# EAGLE board 12VAttinyDischargeChecker-SingleModule (EAGLE 8.5.2)
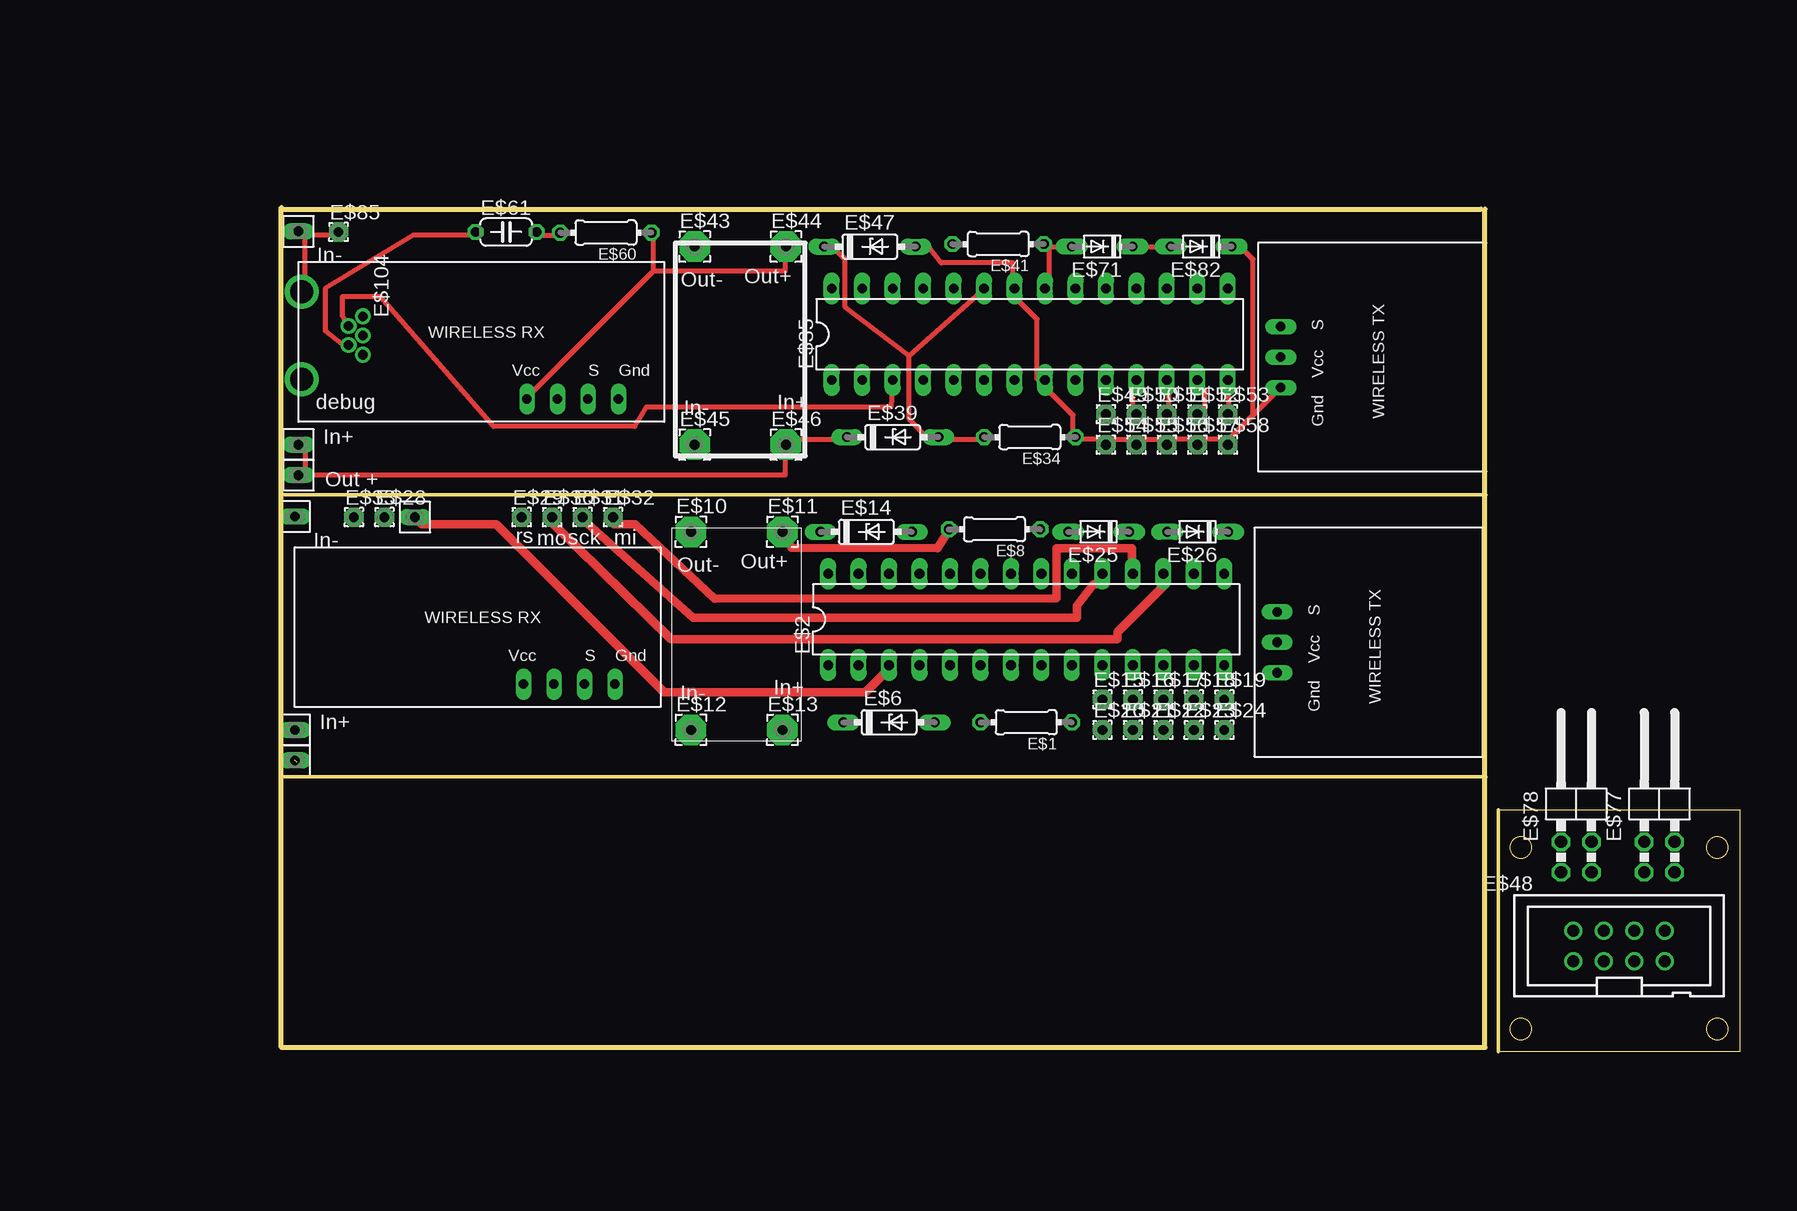
[diagram p0: board, top side]
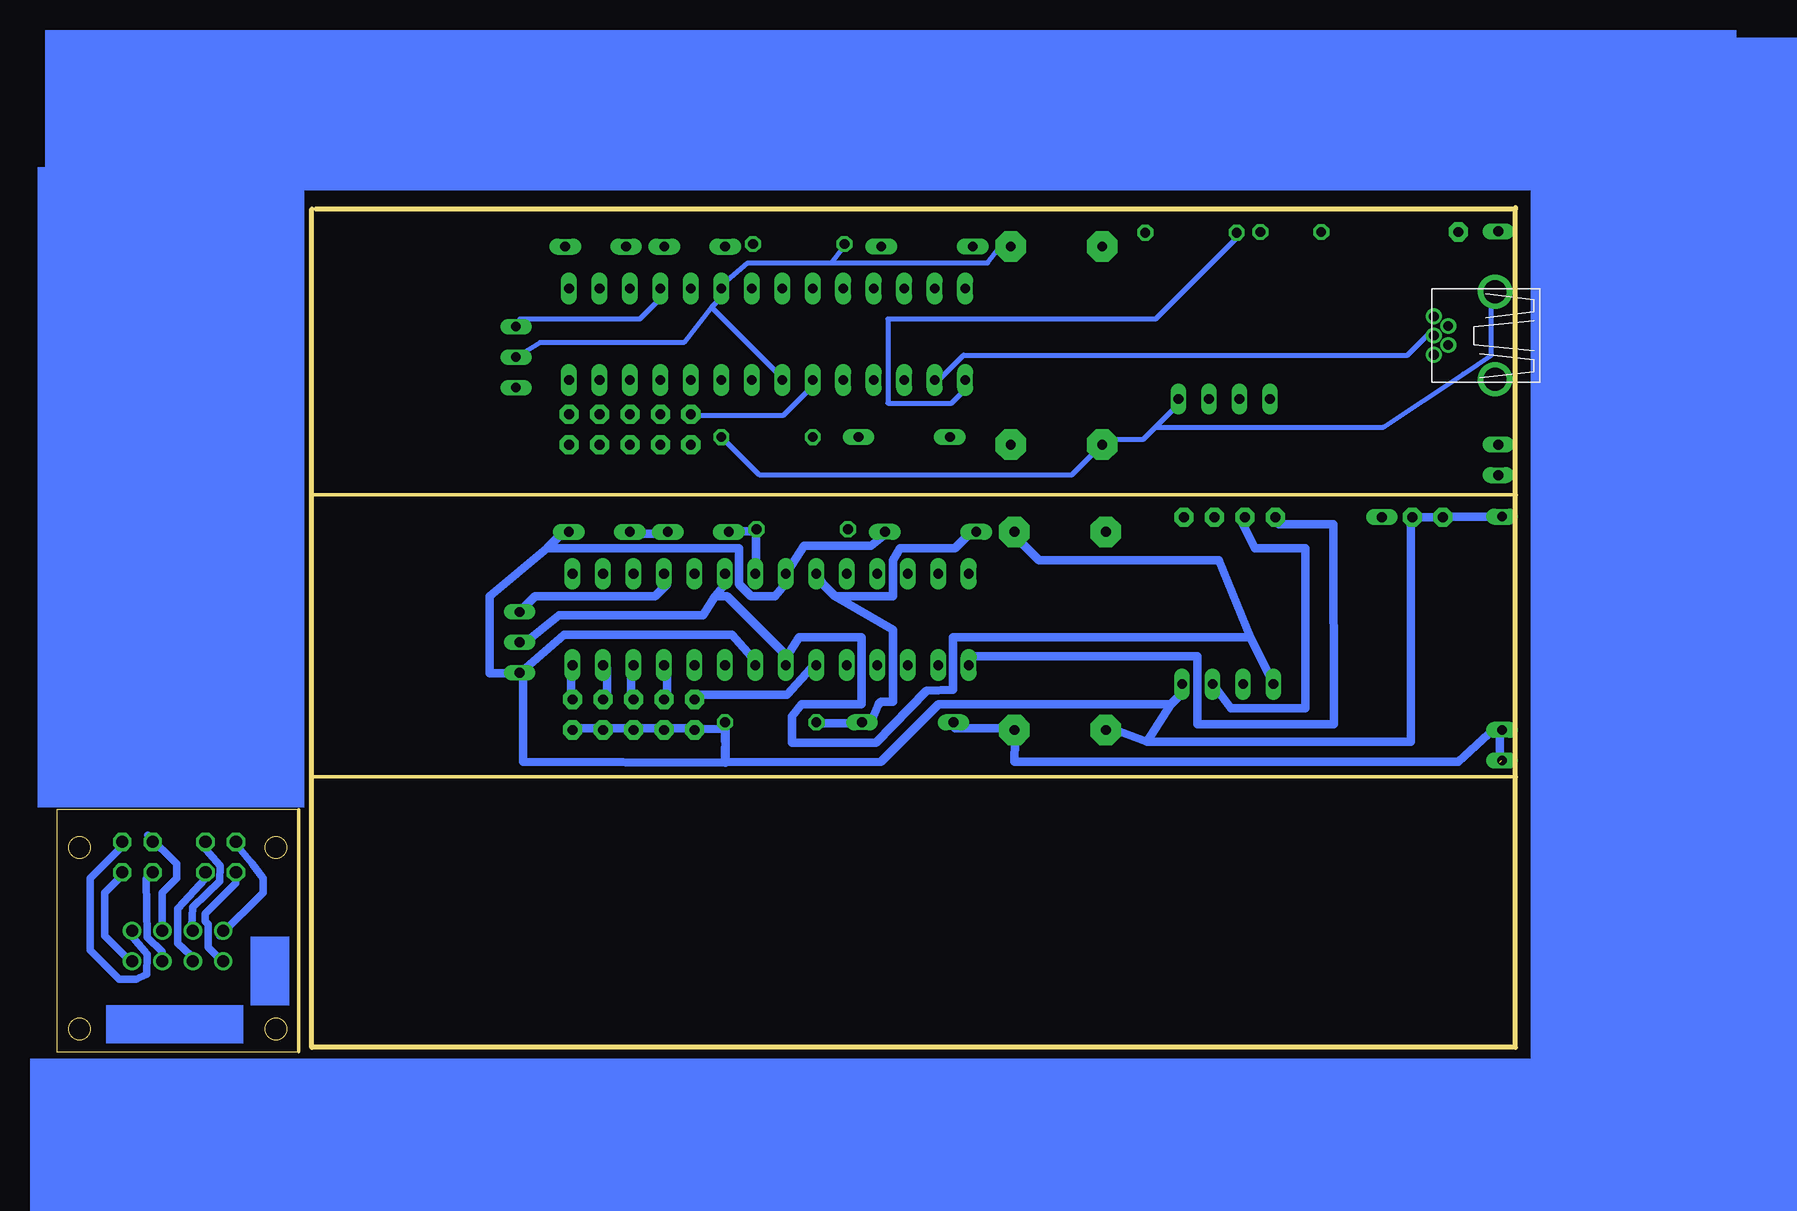
[diagram p1: board, bottom side, seen from below]

Size 121.58 x 70.37 mm. Coordinates in mm from the lower left corner, seen from the top.
Outline: 0,46.4 0,69.9 0,70.05
Outline: 100.33,46.4 100.33,69.9
Outline: 0,46.4 100.33,46.4
Outline: 0,22.91 0,0.37 100.33,0.37 100.33,22.91
Outline: 0,22.91 0,46.4
Outline: 0,46.4 0,70.22
Outline: 0,70.22 0,70.37
Outline: 0,70.22 100,70.22
Outline: 100.33,22.91 100.33,46.4
Outline: 100.33,46.4 100.33,70.22
Outline: 0,22.91 100.33,22.91
Outline: 101.42,0 101.42,20.17 121.58,20.17 121.58,0 101.42,0
Outline: circle at 119.69,17.01 radius 0.89
Outline: circle at 103.31,17.01 radius 0.89
Outline: circle at 103.31,1.89 radius 0.89
Outline: circle at 119.69,1.89 radius 0.89
Copper layers (1*16): Top 0.035mm / dielectric 1.5mm / Bottom 0.035mm
Design rules "default": minimum track width 10mil, minimum drill 24mil, track to track 8mil, track to pad 8mil, pad to pad 8mil, via to via 8mil, smd to smd 8mil, copper to edge 40mil, drill to drill 8mil, minimum pad ring 10mil, minimum via ring 8mil, stop-mask expansion 4mil, vias tented up to drill 0mil, thermal gap 10mil

## Footprints (pad centres in the part's own frame; a part is rotated, then mirrored left to right if it is on the bottom)
0204/7 = drill 0.813 octagon: 1 -3.81,0; 2 3.81,0
DIL28-3 = drill 0.813 long: 1 -16.51,-3.81; 2 -13.97,-3.81; 3 -11.43,-3.81; 4 -8.89,-3.81; 5 -6.35,-3.81; 6 -3.81,-3.81; 7 -1.27,-3.81; 8 1.27,-3.81; 9 3.81,-3.81; 10 6.35,-3.81; 11 8.89,-3.81; 12 11.43,-3.81; 13 13.97,-3.81; 14 16.51,-3.81; 15 16.51,3.81; 16 13.97,3.81; 17 11.43,3.81; 18 8.89,3.81; 19 6.35,3.81; 20 3.81,3.81; 21 1.27,3.81; 22 -1.27,3.81; 23 -3.81,3.81; 24 -6.35,3.81; 25 -8.89,3.81; 26 -11.43,3.81; 27 -13.97,3.81; 28 -16.51,3.81
WIRELESS-TX-FLAT = drill 0.8 long: P$1 0.635,-6.35; P$2 -1.905,-6.35; P$3 3.175,-6.35
FE01-1 = drill 0.813 long: 1 -1.27,0
DO35Z7 = drill 0.813 long: A 3.81,0; C -3.81,0
WIRELESS-RX-FLAT = drill 0.8 long: P$1 3.81,-6.985; P$2 6.35,-6.985; P$3 8.89,-6.985; P$4 11.43,-6.985
2,54/0,8 = drill 0.813 pad 2.54 octagon: 1 0,0
1,6/0,8 = drill 0.813 pad 1.6 octagon: 1 0,0
DO34-5 = drill 0.813 long: A 2.54,0; C -2.54,0
PAK100/2500-8 = drill 1 pad 1.422: 3 -2.54,-1.27; 4 -2.54,1.27; 5 0,-1.27; 6 0,1.27; 7 2.54,-1.27; 8 2.54,1.27; 9 5.08,-1.27; 10 5.08,1.27
C050-024X044 = drill 0.813 octagon: 1 -2.54,0; 2 2.54,0
2X02/90 = drill 1.016 octagon: 1 -1.27,-6.35; 2 -1.27,-3.81; 3 1.27,-6.35; 4 1.27,-3.81
USB-MB-H = drill 0.8: D+ 5.1,0; D- 3.9,0.8; GND 5.1,-1.6; ID 3.9,-0.8; VBUS 5.1,1.6 | drill 1.9: P$6 0,-3.65; P$7 0,3.65

## Placement (x,y rotation side)
E$1  220  [0204/7]  62.09,27.45 180 top
E$2  [DIL28-3]  62.09,36.02 0 top
E$3  [WIRELESS-TX-FLAT]  89.36,34.75 270 top
E$4  [FE01-1]  1.13,25.54 90 top
E$5  [FE01-1]  1.13,25.54 270 top
E$6  Zener 12v  [DO35Z7]  50.66,27.45 0 top
E$7  [WIRELESS-RX-FLAT]  16.37,37.61 0 top
E$8  220  [0204/7]  59.45,43.53 180 top
E$9  [FE01-1]  1.13,45.86 90 top
E$10  [2,54/0,8]  34.15,43.32 0 top
E$11  [2,54/0,8]  41.77,43.32 0 top
E$12  [2,54/0,8]  34.15,26.81 0 top
E$13  [2,54/0,8]  41.77,26.81 0 top
E$14  Zener 5v  [DO35Z7]  48.75,43.32 0 top
E$15  [1,6/0,8]  68.44,29.35 0 top
E$16  [1,6/0,8]  70.98,29.35 0 top
E$17  [1,6/0,8]  73.52,29.35 0 top
E$18  [1,6/0,8]  76.06,29.35 0 top
E$19  [1,6/0,8]  78.6,29.35 0 top
E$20  [1,6/0,8]  68.44,26.81 0 top
E$21  [1,6/0,8]  70.98,26.81 0 top
E$22  [1,6/0,8]  73.52,26.81 0 top
E$23  [1,6/0,8]  76.06,26.81 0 top
E$24  [1,6/0,8]  78.6,26.81 0 top
E$25  [DO34-5]  68.12,43.32 180 top
E$26  [DO34-5]  76.37,43.32 180 top
E$27  [FE01-1]  11.13,43.28 270 top
E$28  [1,6/0,8]  8.59,44.55 0 top
E$29  [1,6/0,8]  20.02,44.55 0 top
E$30  [1,6/0,8]  22.56,44.55 0 top
E$31  [1,6/0,8]  25.1,44.55 0 top
E$32  [1,6/0,8]  27.64,44.55 0 top
E$33  [1,6/0,8]  6.05,44.55 0 top
E$34  220  [0204/7]  62.38,51.22 180 top
E$35  [DIL28-3]  62.38,59.79 0 top
E$36  [WIRELESS-TX-FLAT]  89.66,58.52 270 top
E$37  [FE01-1]  1.42,49.31 90 top
E$38  [FE01-1]  1.42,49.31 270 top
E$39  Zener 12v  [DO35Z7]  50.95,51.22 0 top
E$40  [WIRELESS-RX-FLAT]  16.66,61.38 0 top
E$41  220  [0204/7]  59.75,67.3 180 top
E$42  [FE01-1]  1.42,69.63 90 top
E$43  [2,54/0,8]  34.44,67.09 0 top
E$44  [2,54/0,8]  42.06,67.09 0 top
E$45  [2,54/0,8]  34.44,50.58 0 top
E$46  [2,54/0,8]  42.06,50.58 0 top
E$47  Zener 5v  [DO35Z7]  49.05,67.09 0 top
E$48  [PAK100/2500-8]  110.25,8.82 0 top
E$49  [1,6/0,8]  68.73,53.12 0 top
E$50  [1,6/0,8]  71.27,53.12 0 top
E$51  [1,6/0,8]  73.81,53.12 0 top
E$52  [1,6/0,8]  76.35,53.12 0 top
E$53  [1,6/0,8]  78.89,53.12 0 top
E$54  [1,6/0,8]  68.73,50.58 0 top
E$55  [1,6/0,8]  71.27,50.58 0 top
E$56  [1,6/0,8]  73.81,50.58 0 top
E$57  [1,6/0,8]  76.35,50.58 0 top
E$58  [1,6/0,8]  78.89,50.58 0 top
E$60  10k  [0204/7]  27.05,68.25 180 top
E$61  [C050-024X044]  18.73,68.31 0 top
E$70  [LOGO]  -39.37,56.56 0 top  (outside the outline)
E$71  [DO34-5]  68.42,67.09 180 top
E$77  [2X02/90]  114.86,21.3 0 top
E$78  [2X02/90]  107.94,21.3 0 top
E$82  [DO34-5]  76.67,67.09 180 top
E$85  [1,6/0,8]  4.76,68.31 0 top
E$104  [USB-MB-H]  1.7,59.68 0 top

## Library data of the parts
E$1 E$8 E$34 E$41 E$60 = eagle-ltspice
E$2 E$35 = 74xx-us
E$3 E$7 E$36 E$40 = LSGPackages
E$4 E$5 E$9 E$27 E$37 E$38 E$42 = con-lsta2
E$6 E$14 E$39 E$47 = ref-packages
E$10-E$13 E$15-E$24 E$28-E$33 E$43-E$46 E$49-E$58 E$85 = wirepad
E$25 E$26 E$71 E$82 = diode
E$48 = con-3m
E$61 = resistor
E$70 = atmel
E$77 E$78 = pinhead
E$104 = con-usb-3

## Nets
S$2: E$2.7 E$2.20 E$3.P$1 E$7.P$1 E$8.2 E$11.1
S$3: E$4.1 E$5.1 E$6.C E$13.1
S$4: E$1.2 E$2.23 E$6.A E$14.C
S$5: E$1.1 E$2.8 E$2.22 E$3.P$3 E$7.P$4 E$12.1 E$14.A E$20.1 E$21.1 E$22.1 E$23.1 E$24.1 E$26.C E$28.1 E$33.1
S$7: E$2.18 E$3.P$2 E$32.1
S$8: E$2.21 E$8.1 E$25.A
S$9: E$2.17 E$7.P$3 E$30.1
S$10: E$2.14 E$19.1
S$11: E$2.13 E$18.1
S$12: E$2.12 E$17.1
S$13: E$2.11 E$16.1
S$14: E$2.10
S$15: E$25.C E$26.A
S$16: E$2.3 E$27.1
S$17: E$2.6 E$15.1
S$18: E$2.1 E$29.1
S$19: E$2.19 E$31.1
S$20: E$35.7 E$35.20 E$36.P$1 E$40.P$1 E$41.2 E$44.1 E$60.1
S$21: E$37.1 E$38.1 E$39.C E$46.1
S$22: E$34.2 E$35.23 E$39.A E$47.C
S$23: E$34.1 E$35.8 E$35.22 E$36.P$3 E$40.P$4 E$42.1 E$45.1 E$47.A E$54.1 E$55.1 E$56.1 E$57.1 E$58.1 E$82.C E$85.1 E$104.P$7
S$24: E$35.18 E$36.P$2
S$25: E$35.21 E$41.1 E$71.A
S$26: E$35.1 E$60.2 E$61.2
S$27: E$35.14 E$53.1
S$28: E$35.13 E$52.1
S$29: E$35.12 E$51.1
S$30: E$35.11 E$50.1
S$31: E$35.10
S$32: E$35.3 E$104.D-
S$33: E$35.2 E$104.D+
S$34: E$61.1 E$104.ID
S$37: E$71.C E$82.A
S$43: E$48.10 E$77.4
S$44: E$48.9 E$77.3
S$47: E$35.6 E$49.1
S$51: E$48.8 E$77.2
S$52: E$48.7 E$77.1
S$53: E$48.6 E$78.4
S$54: E$48.5 E$78.3
S$55: E$48.4 E$78.2
S$56: E$78.1

## Tracks (layer width: path | path; a pad name or v marks a point on that pad's centre or on a via)
S$2
  Top 0.7: E$8.2 55.7,43.56 54.7,41.96 42.53,41.98 42.13,42.98 E$11.1
  Bottom 0.7: 66.7,37.96 65.9,38.96 E$2.20 | 66.7,37.96 67.7,36.36 79.7,36.36 82.7,33.96 E$3.P$1 | 60.7,32.96 65.7,37.96 66.7,37.96 | 22.1,34.56 24.7,40.96 39.7,40.96 41.7,42.96 E$11.1 | 22.1,34.56 20.37,31.01 E$7.P$1 | 60.7,32.96 59.7,34.56 54.5,34.56 54.5,28.96 59.5,28.96 60.3,27.96 60.3,25.76 53.3,25.76 49.08,30.1 46.9,30.16 46.9,34.56 22.1,34.56 | 60.7,32.96 E$2.7
S$3  (1 unrouted)
  Bottom 0.7: E$6.C 46.7,26.96 42.7,26.96 E$13.1 41.7,25.96 41.75,24.15 4.75,24.15 1.7,26.96 E$5.1 1.3,26.74 1.3,24.11
S$4
  Bottom 0.7: E$1.2 58.5,27.36 54.5,27.36 E$6.A 53.7,27.56 53.71,27.47 53.1,28.96 52.9,29.16 51.9,29.16 51.9,35.16 56.7,37.96 | 56.7,37.96 57.7,38.96 E$2.23 | 56.7,37.96 51.9,37.96 51.9,40.96 51.3,41.96 46.7,41.96 45.7,42.96 E$14.C
S$5
  Bottom 0.152: 6.42,44.59 6.47,44.55
  Bottom 0.254: 76.7,26.96 E$23.1 75.7,26.96 | 78.7,26.96 E$24.1 | 68.7,26.96 E$20.1 68.53,26.9 | 70.7,26.96 E$21.1 71.7,26.96 | 73.7,26.96 E$22.1
  Bottom 0.7: E$14.A 52.7,42.96 53.7,42.16 59.3,42.16 60.7,39.96 E$2.22 60.9,38.96 61.7,37.96 63.7,37.96 64.7,38.96 64.7,41.96 80.7,41.96 | E$3.P$3 82.7,30.96 82.7,24.16 65.86,24.1 E$1.1 65.84,26.88 | E$2.8 63.7,32.96 65.3,34.76 79.3,34.76 82.5,31.96 E$3.P$3 | 80.7,41.96 85.5,37.96 85.5,31.56 83.7,31.56 E$3.P$3 | 80.7,41.96 79.7,42.96 E$26.C | 30.7,25.84 28.7,28.96 | 28.7,28.96 27.7,29.96 E$7.P$4 | 30.7,25.84 33.7,26.96 E$12.1 | 30.7,25.84 8.7,25.84 8.7,43.96 E$28.1 6.47,44.55 E$33.1 | 65.84,26.88 65.89,24.12 52.9,24.16 48.1,28.96 28.7,28.96 | 78.7,26.96 76.7,26.96 | 70.7,26.96 68.7,26.96 | 71.7,26.96 73.7,26.96 75.7,26.96 | 65.84,26.88 68.53,26.9 | 1.13,44.59 6.42,44.59
S$7
  Top 0.254: 70.9,39.96 E$2.18
  Top 0.7: 70.9,39.96 70.9,41.96 65.7,41.96 64.61,41.94 64.61,37.77 36.1,37.76 29.5,43.96 27.7,43.96 E$32.1
  Bottom 0.7: E$3.P$2 82.7,36.96 81.7,37.96 71.7,37.96 70.7,38.96 E$2.18
S$8
  Bottom 0.7: 63.3,43.36 63.3,43.56 E$8.1 | 63.3,43.36 63.3,39.76 E$2.21 | 63.3,43.36 64.7,43.36 E$25.A
S$9
  Top 0.254: 22.7,43.96 E$30.1
  Top 0.7: E$2.17 73.7,38.96 69.7,34.96 69.7,34.36 32.5,34.36 22.7,43.96
  Bottom 0.7: E$7.P$3 24.7,29.96 23.7,28.61 17.5,28.61 17.5,41.96 21.7,41.96 22.7,43.96 E$30.1
S$10
  Bottom 0.254: 78.7,31.96 E$2.14 | 78.7,29.96 E$19.1
  Bottom 0.7: 78.7,29.96 78.7,31.96
S$11
  Bottom 0.254: 75.7,31.96 E$2.13 | 75.7,29.96 E$18.1
  Bottom 0.7: 75.7,29.96 75.7,31.96
S$12
  Bottom 0.254: 73.7,31.96 E$2.12 | 73.7,29.96 E$17.1
  Bottom 0.7: 73.7,29.96 73.7,31.96
S$13
  Bottom 0.254: 70.7,31.96 E$2.11 | 70.7,29.96 E$16.1
  Bottom 0.7: 70.7,29.96 70.7,31.96
S$15
  Bottom 0.7: E$25.C 70.5,43.16 73.5,43.16 E$26.A
S$16
  Top 0.254: 50.7,31.96 E$2.3
  Top 0.7: 50.7,31.96 48.7,29.96 31.9,29.96 17.9,43.96 11.7,43.96 E$27.1
S$17
  Bottom 0.7: E$2.6 58.7,31.96 60.7,29.76 68.1,29.76 E$15.1
S$18
  Bottom 0.7: E$2.1 45.7,32.96 26.5,32.96 26.5,27.3 19.7,27.3 15.13,27.29 15.16,43.96 19.7,43.96 E$29.1
S$19
  Top 0.254: 25.1,44.36 E$31.1
  Top 0.7: 25.1,44.36 34.3,36.16 66.3,36.16 66.3,37.16 67.7,38.96 68.7,38.96 E$2.19
S$20
  Top 0.406: 31,65.05 21,55.05 E$40.P$1 | 31,65.05 31,68.05 E$60.1 | 31,65.05 42,65.05 42,67.05 E$44.1
  Bottom 0.406: 67,62.05 66,63.05 E$35.20 66,64.05 64,65.73 57,65.73 | 67,62.05 69.32,59.1 81.32,59.1 83,58.05 E$36.P$1 | 57,65.73 56,67.05 E$41.2 | 67,62.05 61,56.05 E$35.7 | 57,65.73 44,65.73 43,67.05 E$44.1
S$21
  Top 0.406: 2,48.05 2,50.05 E$38.1 | E$39.C 47,51.05 43,51.05 E$46.1 42,50.05 42,48.05 2,48.05 | 2,48.05 E$37.1
S$22
  Top 0.406: 52.32,58 47,62.05 47,66.05 46,67.05 E$47.C | 52.32,58 52.32,52.73 54,51.05 E$39.A 55,51.05 58,51.05 E$34.2 | 52.32,58 58,63.05 E$35.23
S$23
  Top 0.406: 74,51.05 76,51.05 E$57.1 77,51.05 79,51.05 | 79,51.05 81,53.05 | 81,53.05 83,55.05 E$36.P$3 | 81,53.05 81,66.05 80,67.05 E$82.C | 79,51.05 E$58.1 | 69,51.05 66,51.05 | 66,51.05 66,53.05 64,55.05 E$35.8 63,56.05 63,61.05 61,63.05 E$35.22 61,64.05 61,65.73 55,65.73 54,67.05 53,67.05 E$47.A | 66,51.05 E$34.1 | 69,51.05 71,51.05 | 69,51.05 E$54.1 | 71,51.05 74,51.05 | 74,51.05 E$56.1 | 71,51.05 E$55.1 | 2,68.05 4,68.05 E$85.1 | 2,68.05 2,64.05 E$104.P$7 | 2,68.05 E$42.1
  Bottom 0.406: 30,52.05 31,51.05 34,51.05 E$45.1 35,50.05 37,48.05 63,48.05 66,51.05 E$34.1 | 30,52.05 28,54.05 E$40.P$4 | 30,52.05 11,52.05 4.37,56.46 2,58.05 2,63.05 E$104.P$7
S$24
  Bottom 0.406: E$36.P$2 83,61.05 73,61.05 71,63.05 E$35.18
S$25
  Top 0.406: 64,67.05 65,67.05 E$71.A | 64,67.05 64,64.05 E$35.21 | 64,67.05 E$41.1
S$26
  Top 0.406: E$60.2 23,68.05 21,68.05 E$61.2
  Bottom 0.406: E$35.1 46,55.05 47,54.05 52.32,54.05 52.32,61.05 30,61.05 23,68.05 E$60.2
S$27
  Top 0.406: E$35.14 79,55.05 79,53.05 E$53.1
S$28
  Top 0.406: E$35.13 77,55.05 77,53.05 E$52.1
S$29
  Top 0.406: E$35.12 74,55.05 74,53.05 E$51.1
S$30
  Top 0.406: E$35.11 71,55.05 71,53.05 E$50.1
S$32
  Top 0.406: E$35.3 50.8,53.71 30.41,53.71 29.45,52.12 17.67,52.12 8.26,62.91 5.08,62.91 5.08,61.33 5.5,60.69 E$104.D-
S$33
  Bottom 0.406: E$104.D+ 7,60.05 9,58.05 46,58.05 48,56.05 E$35.2
S$34
  Top 0.406: E$104.ID 5,59.05 3.66,60.07 3.66,63.61 11,68.05 16,68.05 E$61.1
S$37
  Top 0.406: E$71.C 71,67.05 74,67.05 E$82.A
S$43
  Bottom 0.61: E$48.10 115.23,9.48 114.06,8.12 114.1,6.46 114.95,6.05 116.4,6.05 118.8,8.45 118.8,14.45 116.4,16.85 E$77.4
S$44
  Bottom 0.61: E$48.9 115.2,7.25 117.6,9.65 117.6,13.25 116.4,14.45 E$77.3
S$47
  Bottom 0.406: E$35.6 59,55.05 61,53.05 68,53.05 E$49.1
S$51
  Bottom 0.61: E$48.8 112.8,9.65 112.8,13.25 111.6,14.45 111.6,15.65 114,18.05 E$77.2
S$52
  Bottom 0.61: E$48.7 112.8,7.25 112.8,8.34 114.05,9.53 114.13,14.43 E$77.1
S$53
  Bottom 0.61: E$48.6 110.4,9.65 110.24,12.05 108,14.21 107.95,15.5 109.2,16.85 E$78.4
S$54
  Bottom 0.61: E$48.5 110.4,7.25 110.4,7.98 111.5,9.02 111.5,11.89 109.2,14.45 E$78.3
S$55
  Bottom 0.61: E$48.4 108,9.65 104.4,13.25 104.4,14.45 105.33,15.67 106.66,17.33 E$78.2
S$56
  Bottom 0.61: E$78.1 106.67,14.04 109.22,11.48 109.22,10.85 108.98,10.61 108.98,8.7 107.95,7.67
(copper drawn outside any net)
  shapes: Bottom area x8

## Text on the board
tPlace: In- | Out- | Out+ | debug | In- | In+ | In+ | Out + | rs | In- | mo | sck | mi | Out- | Out+ | In- | In+ | In+
bTest: Vi | V | A | M | G | R | Bi | B
tPlate: Mosi